# EAGLE board CO2_Sensor_CH340g (EAGLE 9.6.0)
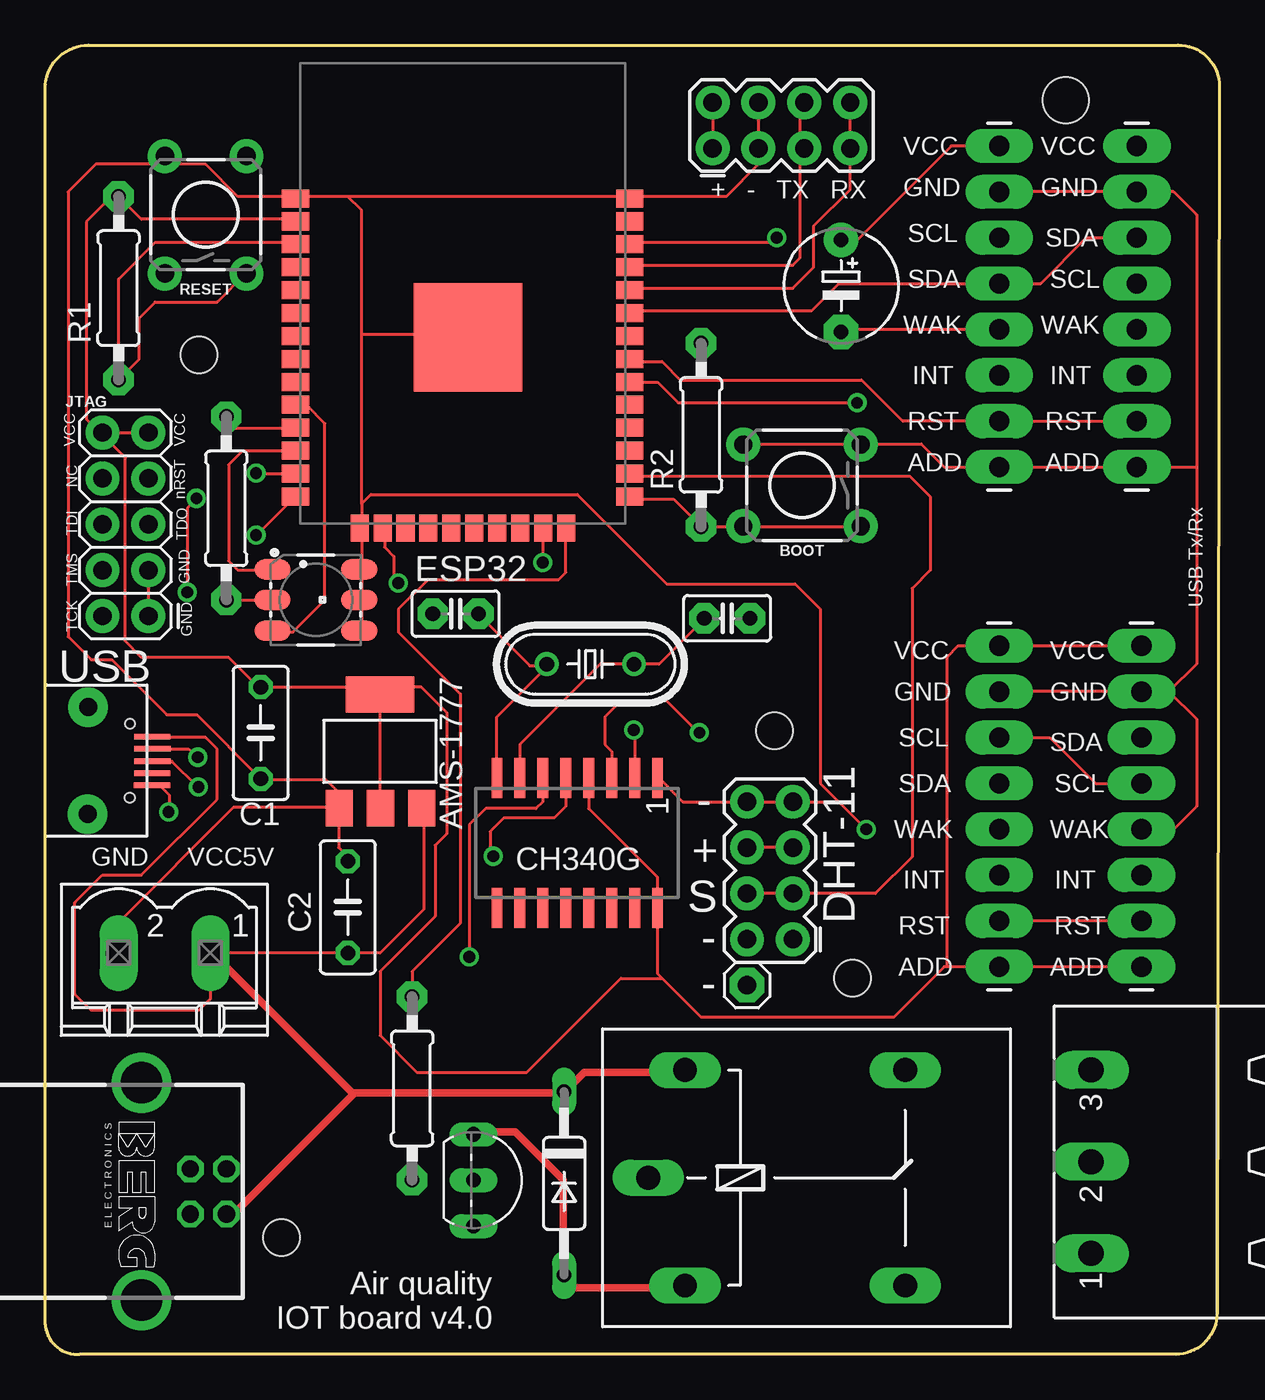
[diagram p0: board, top side]
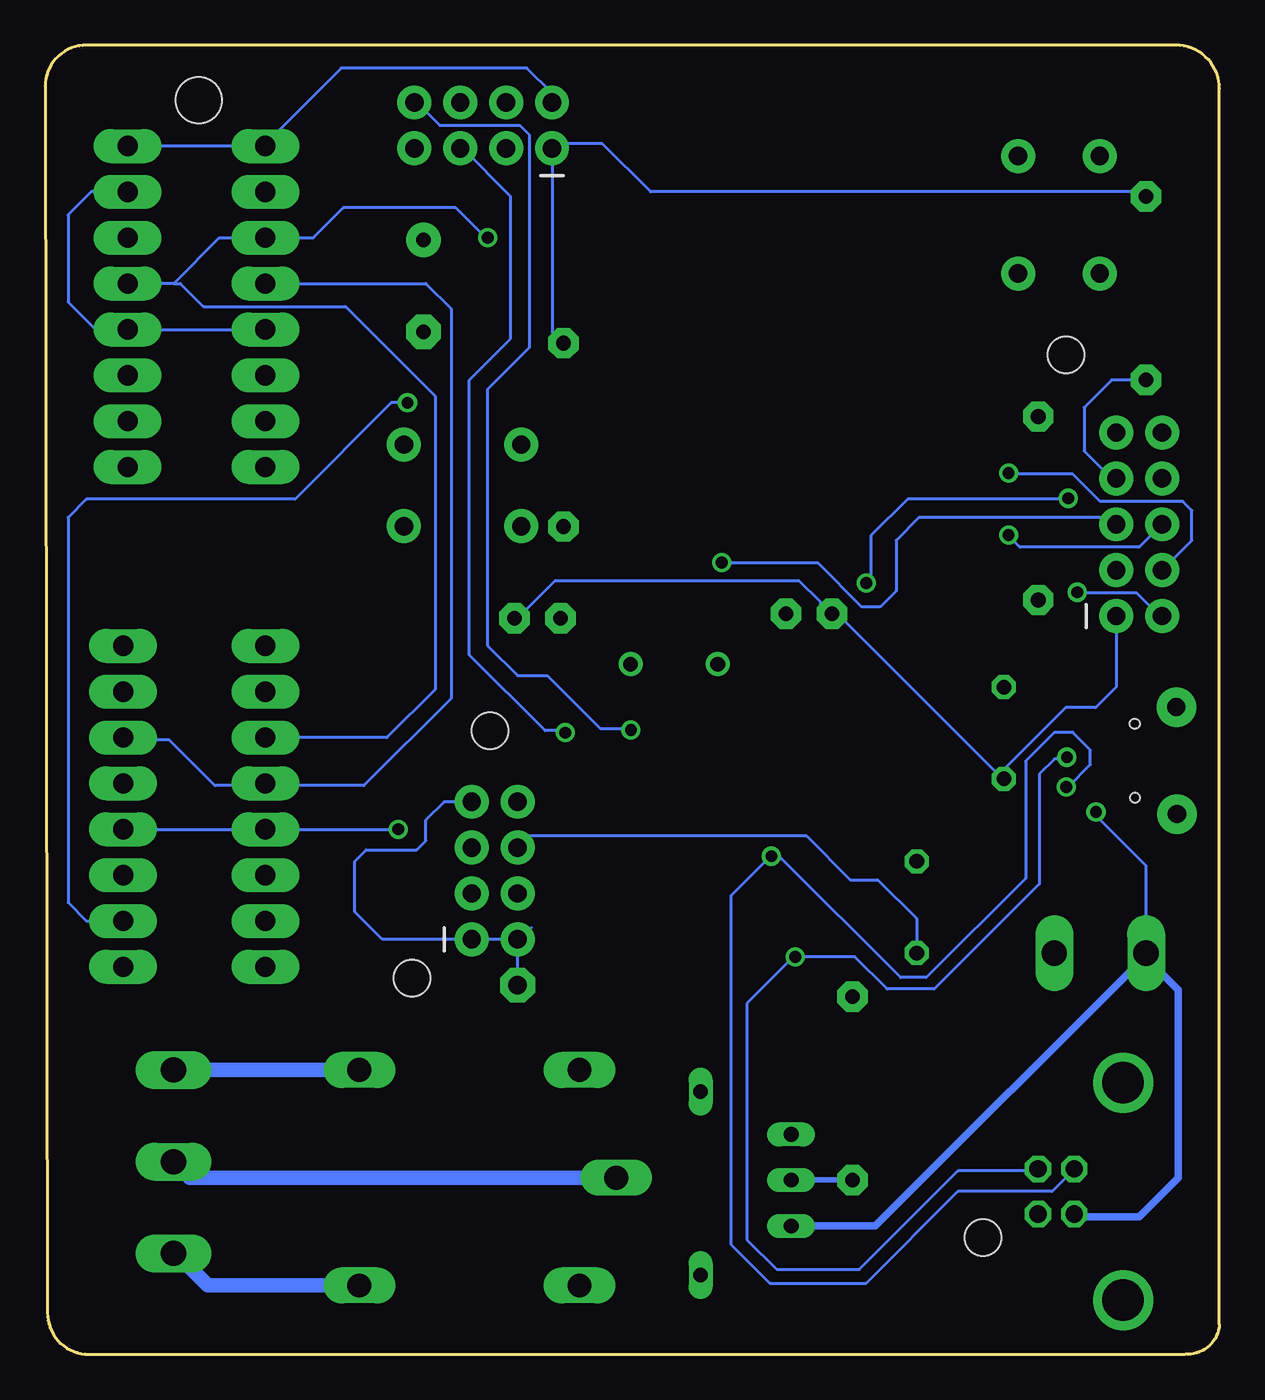
[diagram p1: board, bottom side, seen from below]

Size 65.02 x 72.52 mm. Coordinates in mm from the lower left corner, seen from the top.
Outline: 0,1.66 0,70.11 arc-90 2.41,72.52 62.74,72.52 arc-90 65.02,70.24 64.9,2.29 arc-90 62.61,0 1.91,0 arc-90 0,1.66
Copper layers (1*16): Top 0.035mm / dielectric 1.5mm / Bottom 0.035mm
Design rules "default": minimum track width 6mil, minimum drill 0.35mm, track to track 6mil, track to pad 6mil, pad to pad 6mil, via to via 6mil, smd to smd 6mil, copper to edge 40mil, drill to drill 6mil, minimum pad ring 10mil, minimum via ring 8mil, stop-mask expansion 4mil, vias tented up to drill 0mil, thermal gap 10mil
Holes 2.54 mm at 56.52,69.47
Holes 2.03 mm at 44.7,20.83 8.51,55.38 40.39,34.55 13.08,6.48

## Footprints (pad centres in the part's own frame; a part is rotated, then mirrored left to right if it is on the bottom)
SOT223 = smd 1.499 x 2.007: 1 -2.261,-3.15; 2 0.025,-3.15; 3 2.311,-3.15 | smd 3.81 x 2.007: 4 0,3.15
TO92- = drill 0.813 long: 1 2.54,0; 2 0,0; 3 -2.54,0
TACTILE_SWITCH_PTH_6.0MM = drill 1.016 pad 1.88: 1 -3.251,2.261; 2 3.251,2.261; 3 -3.251,-2.261; 4 3.251,-2.261
C050-030X075 = drill 0.813 octagon: 1 -2.54,0; 2 2.54,0
SOP16 = smd 0.6 x 2.2: 1 -4.445,-3.6; 2 -3.175,-3.6; 3 -1.905,-3.6; 4 -0.635,-3.6; 5 0.635,-3.6; 6 1.905,-3.6; 7 3.175,-3.6; 8 4.445,-3.6; 9 4.445,3.6; 10 3.175,3.6; 11 1.905,3.6; 12 0.635,3.6; 13 -0.635,3.6; 14 -1.905,3.6; 15 -3.175,3.6; 16 -4.445,3.6
C2992 = drill 0.813 long: A 5.08,0; C -5.08,0
1X08_LONGPADS = drill 1.118 pad 1.88 long: 1 0,0; 2 2.54,0; 3 5.08,0; 4 7.62,0; 5 10.16,0; 6 12.7,0; 7 15.24,0; 8 17.78,0
2X4 = drill 1.016 pad 1.88: 1 -3.81,-1.27; 2 -3.81,1.27; 3 -1.27,-1.27; 4 -1.27,1.27; 5 1.27,-1.27; 6 1.27,1.27; 7 3.81,-1.27; 8 3.81,1.27
MSTBV2 = drill 1.397 long: 1 -2.54,0; 2 2.54,0
LED-TRICOLOR-5050 = smd 2 x 1.1: 1 -2.4,1.7; 2 -2.4,0; 3 -2.4,-1.7; 4 2.4,-1.7; 5 2.4,0; 6 2.4,1.7
1X01 = drill 1.016 pad 1.93 octagon: 1 0,0
MICR-USB = drill 1 pad 2.184: P$1 0.343,0.337; P$2 6.273,0.305 | smd 0.305 x 2.01: P$3 1.991,3.887; P$4 2.665,3.891; P$5 3.35,3.891; P$6 4.003,3.887; P$7 4.676,3.871 | hole 0.55: 5.363,2.633; 1.267,2.646
HC49/S = drill 0.813: 1 -2.413,0; 2 2.413,0
C025-025X050 = drill 0.813 pad 1.676 octagon: 1 -1.27,0; 2 1.27,0
G5LE = drill 1.321 long: 1 -7.493,-5.969; 2 -7.493,5.969; O 4.699,5.969; P -9.525,0; S 4.699,-5.969
MSTBA3 = drill 1.397 long: 1 -5.08,5.08; 2 0,5.08; 3 5.08,5.08
E5-6 = drill 0.813 pad 1.905: + -2.54,0 | drill 0.813 pad 1.905 octagon: - 2.54,0
PN61729-S = drill 0.95 octagon: 1 1.25,4.71; 2 -1.25,4.71; 3 -1.25,2.71; 4 1.25,2.71 | drill 2.3 pad 2.9: S1 -6.02,0; S2 6.02,0
ESP-WROOM-32 = smd 1.5 x 1: 1 -9.25,7; 2 -9.25,5.73; 3 -9.25,4.46; 4 -9.25,3.19; 5 -9.25,1.92; 6 -9.25,0.65; 7 -9.25,-0.62; 8 -9.25,-1.89; 9 -9.25,-3.16; 10 -9.25,-4.43; 11 -9.25,-5.7; 12 -9.25,-6.97; 13 -9.25,-8.24; 14 -9.25,-9.51; 25 9.25,-9.51; 26 9.25,-8.24; 27 9.25,-6.97; 28 9.25,-5.7; 29 9.25,-4.43; 30 9.25,-3.16; 31 9.25,-1.89; 32 9.25,-0.62; 33 9.25,0.65; 34 9.25,1.92; 35 9.25,3.19; 36 9.25,4.46; 37 9.25,5.73; 38 9.25,7 | smd 1 x 1.5: 15 -5.7,-11.25; 16 -4.43,-11.25; 17 -3.16,-11.25; 18 -1.89,-11.25; 19 -0.62,-11.25; 20 0.65,-11.25; 21 1.92,-11.25; 22 3.19,-11.25; 23 4.46,-11.25; 24 5.73,-11.25 | smd 6 x 6: GND 0.3,-0.7
2X5 = drill 1.016 pad 1.88: 1 0,0; 2 0,2.54; 3 2.54,0; 4 2.54,2.54; 5 5.08,0; 6 5.08,2.54; 7 7.62,0; 8 7.62,2.54; 9 10.16,0; 10 10.16,2.54
0207/10 = drill 0.813 pad 1.676 octagon: 1 -5.08,0; 2 5.08,0

## Placement (x,y rotation side)
AMS-1777  3.3v  [SOT223]  18.54,33.41 0 top
BC547  BC547  [TO92-]  23.72,9.65 270 top
BOOT  [TACTILE_SWITCH_PTH_6.0MM]  41.91,48.14 180 top
C1  100uF  [C050-030X075]  11.94,34.42 90 top
C2  100uF  [C050-030X075]  16.76,24.77 90 top
CH340G  [SOP16]  29.46,28.33 180 top
D2  [C2992]  28.73,9.47 270 top
E$1  [1X08_LONGPADS]  60.45,49.15 90 top
E$2  [2X4]  40.77,68.08 0 top
E$3  [1X08_LONGPADS]  60.71,21.47 90 top
E$4  [1X08_LONGPADS]  52.83,49.15 90 top
E$5  [MSTBV2]  6.6,22.23 180 top
E$6  [1X08_LONGPADS]  52.83,21.47 90 top
E$7  [LED-TRICOLOR-5050]  14.99,41.79 0 top
E$8  [1X01]  38.86,20.45 0 top
E$9  [2X4]  40.13,26.8 90 top
E$10  [MICR-USB]  2.05,36.2 270 top
E$11  12Mhz  [HC49/S]  30.19,38.23 0 top
E$12  22pf  [C025-025X050]  37.76,40.77 180 top
E$13  22pf  [C025-025X050]  22.73,41.03 180 top
E$15  [G5LE]  42.93,9.78 0 top
E$17  [MSTBA3]  62.99,10.67 90 top
E$18  1000uf  [E5-6]  44.07,59.19 270 top
E$19  [PN61729-S]  5.33,9.02 270 top
ESP32  [ESP-WROOM-32]  23.11,57.03 0 top
JTAG  [2X5]  5.71,40.9 90 top
R1  10k  [0207/10]  4.06,59.06 90 top
R2  10k  [0207/10]  36.32,50.93 90 top
R3  220  [0207/10]  20.32,14.74 270 top
R4  68Ω  [0207/10]  10.03,46.87 90 top
RESET  [TACTILE_SWITCH_PTH_6.0MM]  8.89,63.12 90 top

## Library data of the parts
AMS-1777 = burr-brown
BC547 = transistor-npn
BOOT RESET = SparkFun-Switches
C1 C2 E$8 E$12 E$13 E$18 R1-R4 = adafruit
CH340G = ref-packages
D2 = diode
E$1-E$4 E$6 E$9 JTAG = SparkFun-Connectors
E$5 E$17 = con-phoenix-508
E$7 = SparkFun-LED
E$10 = MyMicroUSB
E$11 = crystal
E$15 = relay
E$19 = con-berg
ESP32 = esp32

## Nets
S$2: E$2.6
S$3: E$2.8
S$5: JTAG.4
S$7: R2.1
S$9: R2.2
S$13: E$3.5 E$6.6
S$14: E$4.2
S$15: E$1.6 E$4.5
S$16: E$1.4 E$4.4
S$17: R4.1
S$18: E$18.-
S$23: JTAG.7 R1.1
S$24: C2.1
S$26: E$2.1 E$2.2
S$27: E$3.2
S$28: E$9.5
S$29: E$8.1 E$9.2 E$9.7
S$31: E$5.1
S$43: E$2.4 E$3.4 E$3.7 E$4.7
S$47: E$15.P
S$48: E$15.O
S$50: E$2.5
S$55: E$15.S
S$64: E$3.1 E$3.8
S$86: JTAG.5
S$94: JTAG.9 JTAG.10
S$95: C1.1 JTAG.1 JTAG.3
S$96: JTAG.6
S$99: E$18.+

## Tracks (layer width: path | path; a pad name or v marks a point on that pad's centre or on a via)
S$1
  Top 0.152: 32.51,48.65 47.88,48.65 49.02,47.5 49.02,43.44 48.01,42.42 48.01,27.56 45.97,25.53 38.86,25.53
S$2
  Top 0.152: 32.51,60.33 41.4,60.33 41.78,60.71 41.78,69.09 E$2.6
S$3
  Top 0.152: 32.51,59.06 41.4,59.06 42.55,60.2 42.55,62.49 44.58,64.52 E$2.8
S$4
  Top 0.152: 13.72,62.87 5.33,62.87 4.06,64.14
S$5
  Bottom 0.152: JTAG.4 1.52,45.09 1.52,46.74 2.03,47.25 6.6,47.25 8.13,48.77 11.68,48.77
S$6
  Bottom 0.152: 36.2,34.42 36.2,34.04
S$7
  Top 0.152: 32.51,47.38 34.8,47.38 R2.1 45.21,45.85
S$8
  Top 0.152: 25.02,32.26 25.02,35.31 27.81,38.1
S$9
  Bottom 0.152: R2.2 36.96,56.65 36.96,67.19
S$10
  Top 0.152: 11.97,31.84 15.54,31.84 16.26,31.12 16.26,30.31 | 17.02,27.31 16.26,28.07 16.26,30.31 | 16.26,30.31 10.44,30.31 4.06,23.94 4.06,22.23
S$11
  Bottom 0.152: 60.2,66.93 52.96,66.93 48.64,71.25 38.35,71.25 36.96,69.85
S$12
  Top 0.152: 12.7,40.01 13.72,40.01 15.49,41.79 15.49,51.57 14.48,52.58 13.72,52.58
S$13  (via drill 0.65)
  Top 0.152: 32,61.6 40.26,61.6 v40.51,61.85 | E$6.6 55.63,34.17 58.17,31.63 E$3.5
  Bottom 0.152: 57.91,59.31 55.37,61.85 50.16,61.85 48.51,63.5 42.29,63.5 40.64,61.85 v40.51,61.85 | 57.91,59.31 60.71,59.31 | E$6.6 46.1,34.17 43.43,36.83 43.43,53.09 48.39,58.04 56.26,58.04 57.53,59.31 57.91,59.31
S$14
  Top 0.152: 32.51,55 34.16,55 35.18,53.98 45.21,53.98 47.5,51.69 E$4.2 60.58,51.69
S$15
  Top 0.152: 32.26,57.79 42.42,57.79 43.94,59.31 E$4.5 55.12,59.31 57.66,61.85 E$1.6
  Bottom 0.152: E$4.5 43.94,59.31 42.55,57.92 42.55,36.33 47.37,31.5 55.63,31.5 58.17,34.04 60.71,34.04
S$16
  Bottom 0.152: 60.71,64.39 62.48,64.39 63.75,63.12 63.75,58.3 62.23,56.77 E$1.4 E$4.4
S$17
  Top 0.152: R4.1 13.08,41.79
S$18
  Top 0.152: 52.96,56.77 44.2,56.77 E$18.-
S$19
  Top 0.152: 32.51,38.23 30.73,38.23 26.29,33.79 26.29,31.88
S$20
  Top 0.152: 21.46,41.03 21.46,40.39
S$21
  Top 0.152: 10.03,51.95 10.03,51.31 14.22,51.31
S$22
  Top 0.152: 13.84,48.77 11.68,48.77
S$23
  Top 0.152: 11.18,59.95 9.53,58.3 6.1,58.3 5.21,57.41 5.21,55.12 R1.1 4.06,59.57 6.1,61.6 13.46,61.6
  Bottom 0.152: 4.45,53.6 R1.1 5.97,53.98 7.49,52.46 7.49,50.04 5.97,48.52 JTAG.7
S$24
  Bottom 0.152: 39.37,28.71 22.86,28.71 20.45,26.29 18.92,26.29 16.76,24.13 C2.1
S$25
  Top 0.152: 27.56,31.75 27.56,30.61 27.18,30.23 24.38,30.23 23.5,29.34 23.5,22.1
S$26
  Top 0.152: E$2.2 E$2.1
S$27
  Top 0.152: E$3.2 53.09,24.01
S$28
  Top 0.152: E$9.5 38.61,28.07
S$29
  Bottom 0.152: E$8.1 E$9.2 46.35,22.99 47.88,24.52 47.88,27.31 47.24,27.94 44.45,27.94 43.94,28.45 43.94,29.6 42.93,30.61 E$9.7
S$30  (via drill 0.65)
  other vias: 11.68,48.82
S$31
  Top 0.152: 20.95,30.36 20.95,24.64 18.54,22.23 E$5.1 9.14,19.69 8.51,19.05 2.54,19.05 1.65,19.94 1.65,25.02 3.17,26.55 5.33,26.55 9.53,30.74 9.53,33.53 8.89,34.17 5.84,34.17
S$32
  Top 0.152: 23.95,41.03 26.82,38.16 27.85,38.16
S$33
  Top 0.152: 36.55,40.79 34,38.24 32.6,38.24
S$34
  Bottom 0.152: 11.96,31.83 21.01,40.88 22.09,40.88 22.09,41.66 23.26,42.83 36.82,42.83 38.51,41.14 38.51,40.8 38.42,40.71
S$35  (via drill 0.65)
  other vias: 36.23,34.44
S$36  (via drill 0.65)
  other vias: 8.49,31.44
S$37
  Top 0.152: 6.49,33.53 7.94,33.53 8.34,33.13
S$38  (via drill 0.65)
  other vias: 8.44,33.08
S$39
  Top 0.152: 28.83,31.88 28.83,30.36 28.19,29.72 25.4,29.72 24.64,28.96 24.64,27.69
S$40
  Bottom 0.152: 8.26,32.99 9.13,32.99 9.98,32.14 9.98,26.05 15.79,20.23 18.4,20.23 20.19,22.02 23.47,22.02
S$41
  Top 0.152: 32.64,34.55 32.64,31.5
S$42
  Bottom 0.152: 8.37,31.44 7.14,32.67 7.14,33.48 8.12,34.45 9.15,34.45 10.73,32.86 10.73,26.38 16.24,20.87 17.66,20.87 24.37,27.58 24.72,27.58
S$43  (via drill 0.65)
  Top 0.152: 38.61,50.42 48.51,50.42 49.78,49.15 63.75,49.15 | 16.76,64.14 37.72,64.14 39.5,65.92 E$2.4 | 16.76,64.14 13.72,64.14 | 17.53,47.12 17.53,56.52 | 17.53,56.52 17.53,63.38 16.76,64.14 | 17.53,47.12 18.03,47.63 29.46,47.63 34.41,42.68 41.53,42.68 42.93,41.28 42.93,31.63 v45.47,29.09 | 62.23,36.71 E$3.7 52.58,36.71 | 62.23,36.71 63.75,35.18 63.75,30.36 62.48,29.09 E$3.4 | 63.75,49.15 63.75,63.12 62.48,64.39 E$4.7 | 63.75,49.15 63.75,38.23 62.23,36.71 | 17.53,47.12 17.53,40.01 | 45.59,29.09 v45.47,29.09 | v45.47,29.09 43.94,30.61 35.31,30.61 33.91,32.01 | 17.53,56.52 20.95,56.52
  Bottom 0.152: E$3.4 v45.47,29.09
S$44
  Top 0.152: 6.42,32.84 7.01,32.84 8.36,31.5 8.36,31.44
S$46  (via drill 0.65)
  other vias: 32.59,34.59
S$47
  Bottom 0.813: E$15.P 57.02,9.78 57.78,10.55
S$48
  Bottom 0.813: E$15.O 58.04,15.75
S$49
  Bottom 0.152: 3.94,64.39 31.5,64.39 34.16,67.06 36.96,67.06
S$50
  Bottom 0.152: 36.32,34.55 37.34,34.55 41.53,38.74 41.53,53.98 39.24,56.27 39.24,64.14 41.91,66.81 E$2.5
S$51  (via drill 0.65)
  other vias: 19.55,42.72
S$52
  Top 0.152: 13.84,47.5 11.68,45.34
S$53
  Top 0.152: 13.72,50.04 10.92,50.04 10.16,49.28 10.16,43.95 10.67,43.44 12.57,43.44
S$55
  Bottom 0.813: 57.91,5.72 56.01,3.81 E$15.S
S$56
  Top 0.152: 20.32,19.69 20.32,21.21 22.99,23.88 22.99,36.58 19.56,40.01 19.56,41.28 21.21,42.93 28.45,42.93 28.83,43.31 28.83,45.72
S$57
  Bottom 0.152: 38.73,22.99 38.1,23.63
S$58  (via drill 0.65)
  other vias: 23.49,22.02
S$59
  Top 0.406: 23.75,12.32 26.04,12.32 28.7,9.66 28.7,4.32 29.34,3.69 35.56,3.69
S$60
  Bottom 0.406: 4.06,22.1 19.05,7.12 23.75,7.12
S$61
  Top 0.406: 35.43,15.63 29.84,15.63 28.7,14.48 17.14,14.48 | 17.14,14.48 17.02,14.48 9.4,22.1 | 17.14,14.48 10.41,7.75 10.16,7.75
S$62
  Bottom 0.406: 4.06,21.98 2.29,20.2 2.29,9.78 4.45,7.62 8,7.62
S$64
  Top 0.152: 22.23,35.56 | 22.23,35.56 20.83,36.96 18.54,36.96 | 18.54,30.36 18.54,36.96 | 18.54,36.96 11.81,36.96 10.16,38.61 5.33,38.61 4.45,39.5 4.45,49.66 2.29,51.82 2.29,62.74 3.94,64.39 | E$3.8 50.55,39.25 49.91,38.61 49.91,21.47 | E$3.1 49.91,21.47 | 49.91,21.47 49.78,21.47 46.99,18.67 36.32,18.67 34.16,20.83 | 22.23,35.56 22.23,28.83 21.59,28.2 21.59,24.26 18.54,21.21 18.54,17.66 20.57,15.63 26.67,15.63 31.88,20.83 34.16,20.83 | 30.1,32.01 30.1,30.23 33.91,26.42 33.91,21.09 34.16,20.83
S$65
  Bottom 0.152: 24.89,27.56 27.05,25.4 27.05,6.1 24.89,3.94 19.56,3.94 14.48,9.02 9.27,9.02 8.13,10.16
S$66
  Bottom 0.152: 23.62,21.98 26.16,19.44 26.16,6.35 24.51,4.7 19.94,4.7 14.48,10.16 10.03,10.16
S$68
  Top 0.152: 36.2,34.42 34.42,36.2 31.88,36.2 30.99,35.31 30.99,33.79 31.37,33.41 31.37,31.75
S$70  (via drill 0.65)
  other vias: 24.81,27.59
S$74  (via drill 0.65)
  other vias: 6.84,30.04
S$75
  Bottom 0.152: 4.06,22.23 4.06,27.06 6.86,29.85
S$76
  Top 0.152: 6.35,31.5 6.86,30.99 6.86,29.98
S$85
  Bottom 0.152: 44.58,69.47 43.18,68.08 38.73,68.08 38.23,67.57 38.23,55.76 40.51,53.47 40.51,39.25 38.86,37.6 37.21,37.6 34.29,34.68 32.26,34.68
S$86
  Bottom 0.152: JTAG.5 6.1,46.36 16.64,46.36 17.91,45.09 17.91,42.3 18.8,41.41 19.81,41.41 22.23,43.82 27.56,43.82
S$87  (via drill 0.65)
  other vias: 8.38,47.42
S$88  (via drill 0.65)
  other vias: 27.55,43.86
S$89
  Top 0.152: 27.56,45.72 27.56,43.82
S$90
  Top 0.152: 18.8,45.72 18.8,44.71 19.3,44.2 19.3,42.68
S$91  (via drill 0.65)
  other vias: 11.68,45.39
S$92
  Bottom 0.152: 8.38,47.38 17.27,47.38 19.3,45.34 19.3,42.68
S$93  (via drill 0.65)
  other vias: 7.87,42.21
S$94
  Top 0.152: JTAG.10 JTAG.9
S$95
  Top 0.152: 13.72,64.14 10.67,64.14 8.89,65.92 2.79,65.92 1.27,64.39 1.27,39.76 2.54,38.49 3.68,38.49 6.73,35.44 8.38,35.44 C1.1 | JTAG.3 JTAG.1
  Bottom 0.152: JTAG.1 5.71,36.96 6.86,35.82 8.51,35.82 11.94,32.39 C1.1
S$96
  Bottom 0.152: JTAG.6 4.45,44.71 11.05,44.71 11.68,45.34
S$97
  Bottom 0.152: 3.17,40.77 4.57,42.17 7.87,42.17
S$98
  Top 0.152: 8.38,47.38 7.87,46.87 7.87,42.17
S$99
  Top 0.152: 52.96,66.93 50.16,66.93 44.96,61.73 E$18.+
S$100
  Top 0.152: 32.38,53.85 33.91,53.85 35.05,52.71 44.96,52.71
S$101  (via drill 0.65)
  other vias: 44.96,52.71
S$102
  Bottom 0.152: 44.96,52.71 45.85,52.71 51.18,47.38 62.74,47.38 63.75,46.36 63.75,25.02 62.74,24.01 60.71,24.01
S$107
  Bottom 0.305: 24.02,9.68 20.48,9.68

## Text on the board
tNames: VCC | VCC | + - TX RX | GND | GND | SCL | SDA | SDA | SCL | WAK | WAK | INT | INT | RST | RST | VCC | VCC | ADD | ADD | NC | nRST | TDI | TDO | GND | TMS | USB Tx/Rx | TCK | GND | VCC | VCC | USB | GND | GND | SCL | SDA | SDA | SCL | - | WAK | WAK | GND | VCC | 5V | + | INT | INT | S | DHT-11 | RST | RST | - | ADD | ADD | - | Air quality / IOT board v4.0